# Altium PCB TopLayer_lfr.PcbDoc
Units mm, origin at the board's own origin, x right, y up, seen from the top; angles counter-clockwise.
Board outline 140 x 82.71 mm, 2 copper layers (Top Layer, Bottom Layer); 31 components, 20 nets, 97 pads, 0 vias.
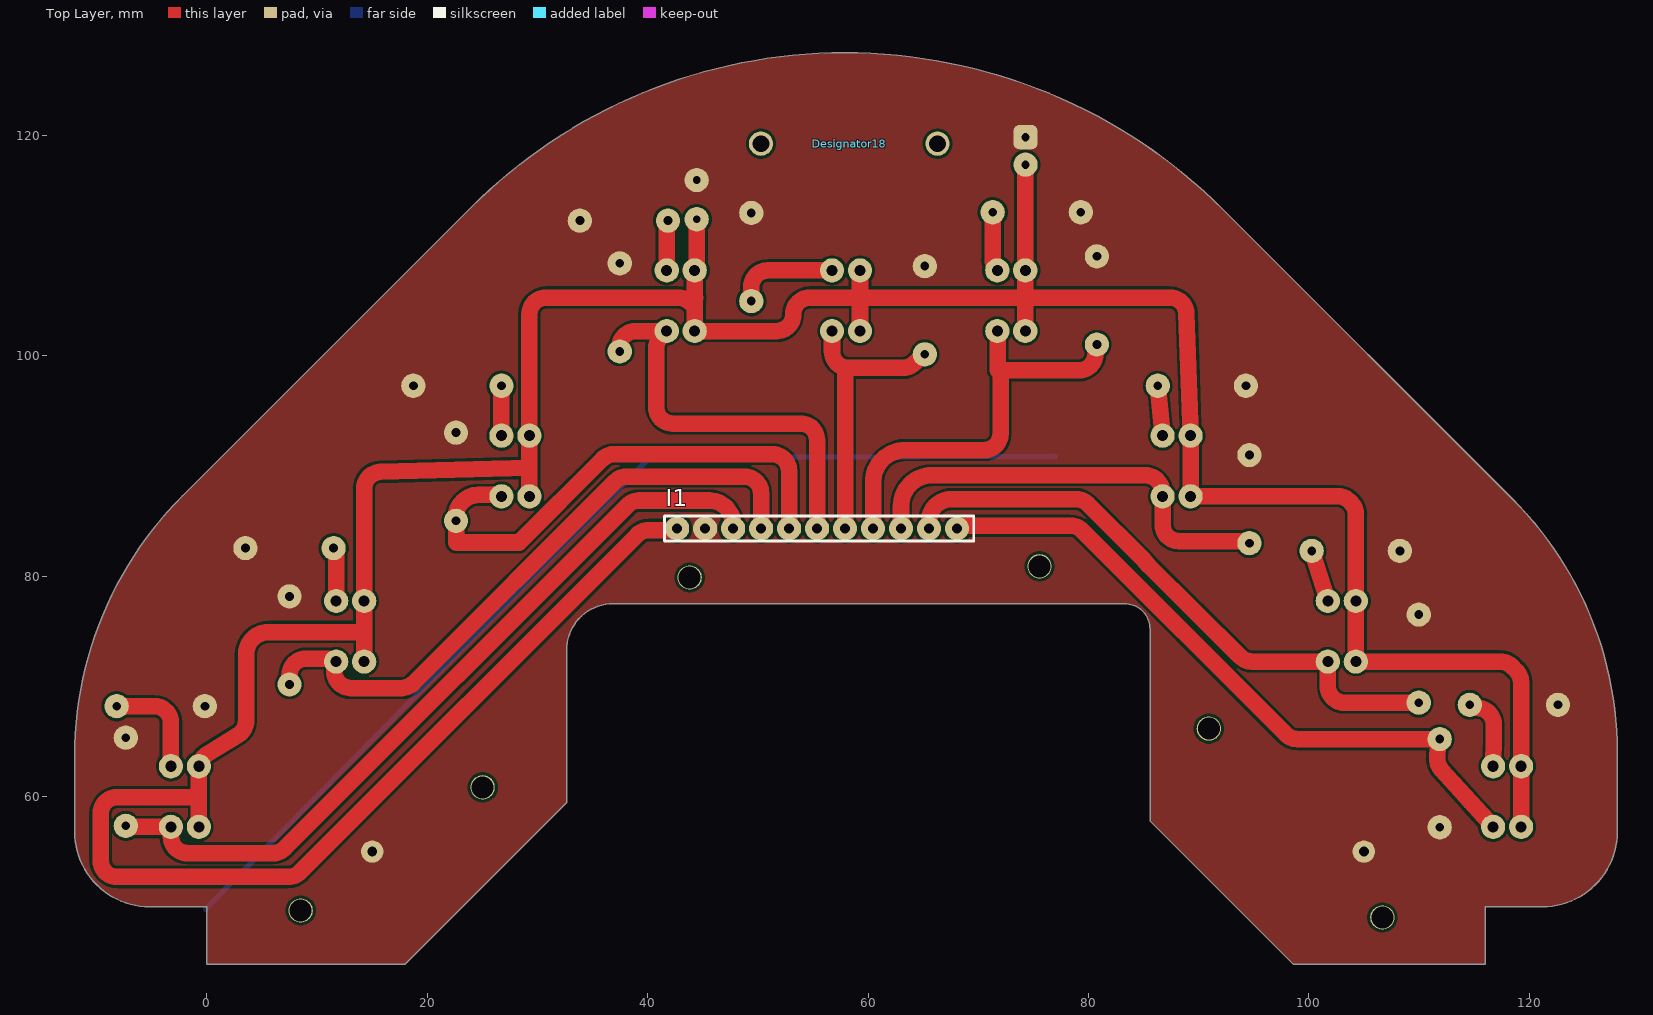
[diagram p0: Top Layer view]
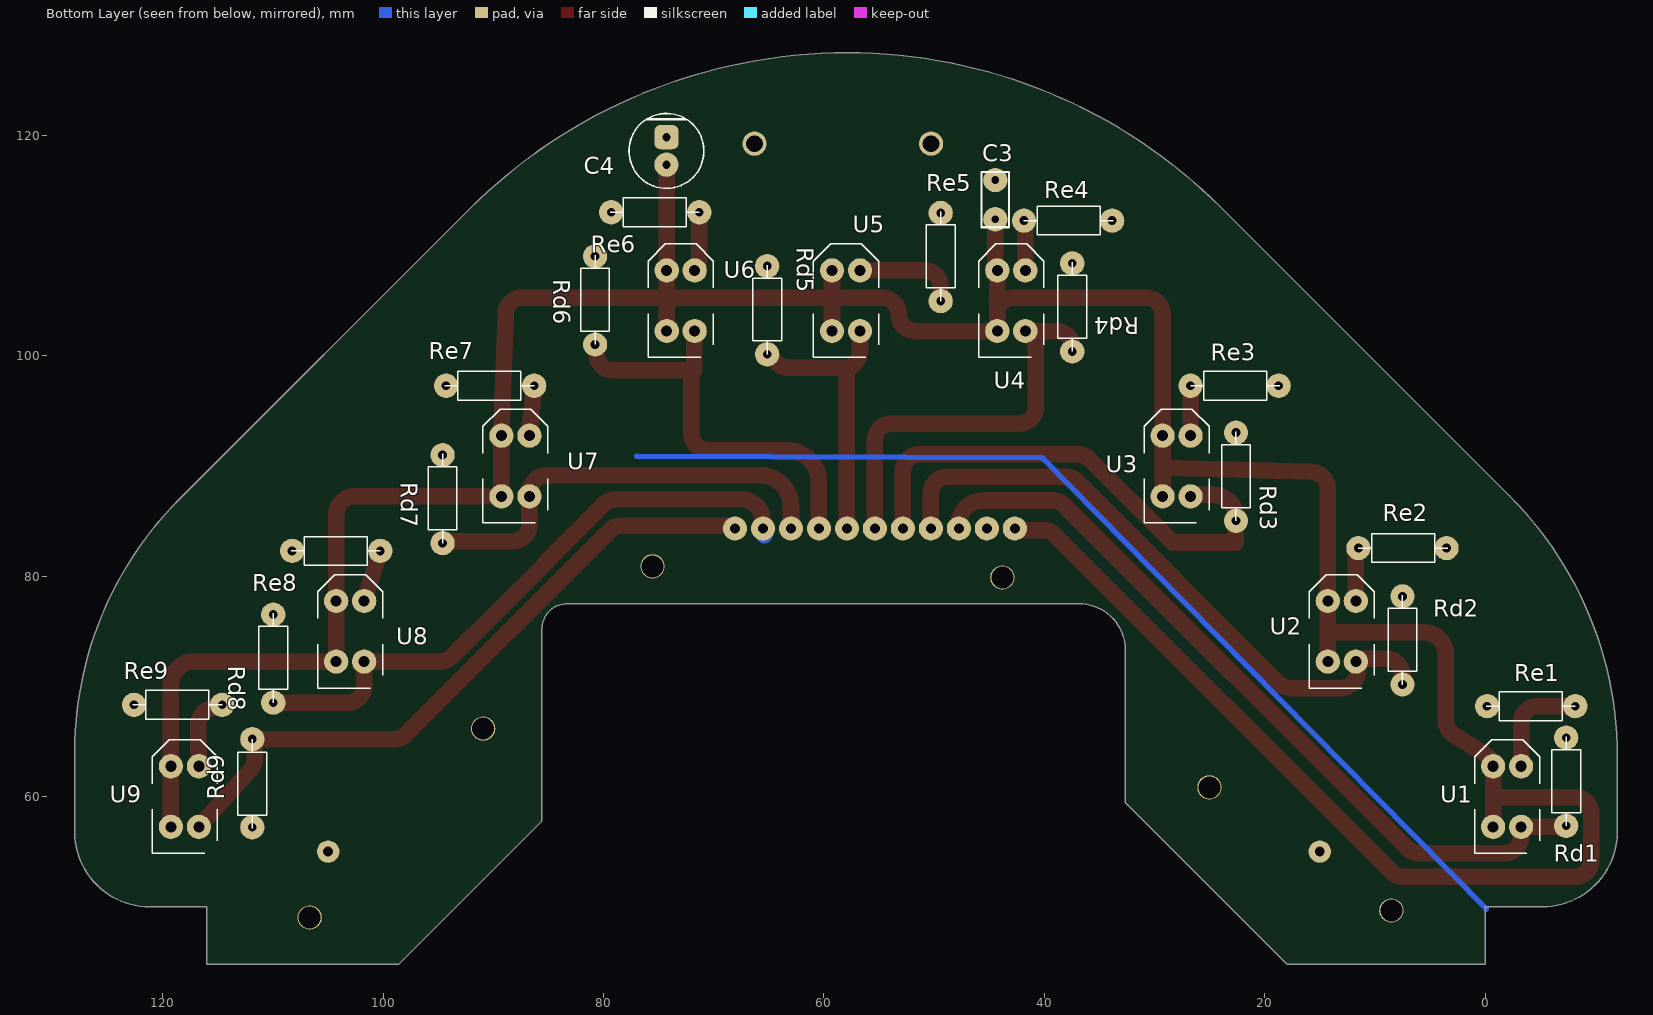
[diagram p1: Bottom Layer view, seen from below]

## Layer stack, top to bottom
Top Solder: solder mask 0.0102, Solder Resist, Dk 3.5
Top Layer: signal copper 0.0356
Dielectric 1: dielectric 0.32, FR-4, Dk 4.8
Bottom Layer: signal copper 0.0356
Bottom Solder: solder mask 0.0102, Solder Resist, Dk 3.5

## Board outline
0,44.8 18.003,44.8 32.639,59.436 32.639,73.279 cw(c36.86,73.279) 36.86,77.5 83.3,77.5 cw(c83.3,75.202) 85.598,75.202 85.598,57.785 98.583,44.8 116,44.8 116,50 121.2,50 ccw(c121.2,56.8) 128,56.8 128,64.02 ccw(c95.456,64.02) 118.468,87.032 92.215,113.285 ccw(c57.878,78.949) 57.878,127.508 ccw(c57.878,79.538) 23.958,113.458 -2.219,87.281 ccw(c21.393,63.668) -12,63.668 -12,56.8 ccw(c-5.2,56.8) -5.2,50 0,50

## Design rules (kind name [scope] priority, off if disabled: settings)
Clearance Clearance_2 [InNamedPolygon('GND_L01_P000')] p1: gap=0.254 ignorepadtopadclearanceinfootprint=FALSE
Clearance Clearance_1 [InNamedPolygon('UP_G_P')] p2: gap=0.254 ignorepadtopadclearanceinfootprint=FALSE
Clearance [All] p3: gap=0.254 ignorepadtopadclearanceinfootprint=FALSE
PolygonConnect PolygonConnect_7 [All vs IsNamedPolygon('GND_L01_P000')] p1: thpad.connectstyle=Direct thpad.reliefconductorwidth=0.254 thpad.reliefentries=4 thpad.polygonreliefangle="90 Angle" thpad.airgapwidth=0.254 smdpad.connectstyle=Relief smdpad.reliefconductorwidth=0.254 smdpad.reliefentries=4 smdpad.polygonreliefangle="90 Angle" smdpad.airgapwidth=0.254 via.connectstyle=Relief via.reliefconductorwidth=0.254 via.reliefentries=4 via.polygonreliefangle="90 Angle" via.airgapwidth=0.254
PolygonConnect PolygonConnect_6 [All vs IsNamedPolygon('NONET_L01_P000')] p2: thpad.connectstyle=Direct thpad.reliefconductorwidth=0.254 thpad.reliefentries=4 thpad.polygonreliefangle="90 Angle" thpad.airgapwidth=0.254 smdpad.connectstyle=Relief smdpad.reliefconductorwidth=0.254 smdpad.reliefentries=4 smdpad.polygonreliefangle="90 Angle" smdpad.airgapwidth=0.254 via.connectstyle=Relief via.reliefconductorwidth=0.254 via.reliefentries=4 via.polygonreliefangle="90 Angle" via.airgapwidth=0.254
PolygonConnect PolygonConnect_5 [All vs IsNamedPolygon('B_G_P')] p3: thpad.connectstyle=Direct thpad.reliefconductorwidth=0.254 thpad.reliefentries=4 thpad.polygonreliefangle="90 Angle" thpad.airgapwidth=0.254 smdpad.connectstyle=Relief smdpad.reliefconductorwidth=0.254 smdpad.reliefentries=4 smdpad.polygonreliefangle="90 Angle" smdpad.airgapwidth=0.254 via.connectstyle=Relief via.reliefconductorwidth=0.254 via.reliefentries=4 via.polygonreliefangle="90 Angle" via.airgapwidth=0.254
PolygonConnect PolygonConnect_4 [All vs IsNamedPolygon('UP_G_P')] p4: thpad.connectstyle=Direct thpad.reliefconductorwidth=0.254 thpad.reliefentries=4 thpad.polygonreliefangle="90 Angle" thpad.airgapwidth=0.254 smdpad.connectstyle=Relief smdpad.reliefconductorwidth=0.254 smdpad.reliefentries=4 smdpad.polygonreliefangle="90 Angle" smdpad.airgapwidth=0.254 via.connectstyle=Relief via.reliefconductorwidth=0.254 via.reliefentries=4 via.polygonreliefangle="90 Angle" via.airgapwidth=0.254
PolygonConnect PolygonConnect_3 [All vs IsNamedPolygon('UP_G_P')] p5: thpad.connectstyle=Relief thpad.reliefconductorwidth=0.254 thpad.reliefentries=4 thpad.polygonreliefangle="90 Angle" thpad.airgapwidth=0.1 smdpad.connectstyle=Relief smdpad.reliefconductorwidth=0.254 smdpad.reliefentries=4 smdpad.polygonreliefangle="90 Angle" smdpad.airgapwidth=0.254 via.connectstyle=Relief via.reliefconductorwidth=0.254 via.reliefentries=4 via.polygonreliefangle="90 Angle" via.airgapwidth=0.254
PolygonConnect PolygonConnect_2 [All vs IsNamedPolygon('UP_G_P')] p6: thpad.connectstyle=Direct thpad.reliefconductorwidth=0.254 thpad.reliefentries=4 thpad.polygonreliefangle="90 Angle" thpad.airgapwidth=0.254 smdpad.connectstyle=Relief smdpad.reliefconductorwidth=0.254 smdpad.reliefentries=4 smdpad.polygonreliefangle="90 Angle" smdpad.airgapwidth=0.254 via.connectstyle=Relief via.reliefconductorwidth=0.254 via.reliefentries=4 via.polygonreliefangle="90 Angle" via.airgapwidth=0.254
PolygonConnect PolygonConnect_1 [All vs IsNamedPolygon('B_G_P')] p7: connectstyle=Direct reliefconductorwidth=0.254 reliefentries=4 polygonreliefangle="90 Angle" airgapwidth=0.254
PolygonConnect [All] p8: connectstyle=Relief reliefconductorwidth=0.254 reliefentries=4 polygonreliefangle="90 Angle" airgapwidth=0.254
RoutingVias [All] p1: holewidth=0.711 width=1.27 viastyle="Through Hole" minholewidth=0.711 minwidth=1.27 maxholewidth=0.711 maxwidth=1.27
SolderMaskExpansion [All] p1: expansion=0.102 istentingtop=FALSE
SupplyNets "Schematic Supply Nets_1" [InNet('GND')] p1: voltage=0.000
SupplyNets "Schematic Supply Nets" [InNet('+5')] p2: voltage=0.000
Width [All] p1: maxlimit=5 minlimit=0.1 preferedwidth=1.2 minimp=50.000000 maximp=50.000000 favimp=50.000000
30 further rules are at their usual default settings.

## Classes and differential pairs
component class MCU: C3 C4
component class IR_array: I1 Rd1 Rd2 Rd3 Rd4 Rd5 Rd6 Rd7 Rd8 Rd9 Re1 Re2 Re3 Re4 Re5 Re6 Re7 Re8 Re9 U1 U2 U3 U4 U5 U6 U7 U8 U9

## Components (designator, comment, footprint, x,y, rotation, side; value= is the part's Value field where it differs from the comment)
C3 "0.1uF" FP-RDE0P1-MFG 44.45,114.173 r90 bottom
C4 "ECEA1CKA101I" FP-RAD-TH-D_6_3_0_5-L_7_1-MFG 74.295,118.598 r270 bottom
Designator18 "Comment" PCBComponent_1 58.293,119.253 r0 top
I1 "MHP1x11" MHP_1x11_ 42.672,84.328 r0 top locked
Rd1 "10k" RESAD1100W55L680D260 -7.366,61.341 r270 bottom
Rd2 "10k" RESAD1100W55L680D260 7.493,74.168 r270 bottom
Rd3 "10k" RESAD1100W55L680D260 22.606,89.027 r270 bottom
Rd4 "10k" RESAD1100W55L680D260 37.465,104.394 r270 bottom
Rd5 "10k" RESAD1100W55L680D260 65.151,104.14 r270 bottom
Rd6 "10k" RESAD1100W55L680D260 80.772,105.029 r270 bottom
Rd7 "10k" RESAD1100W55L680D260 94.615,86.995 r270 bottom
Rd8 "10k" RESAD1100W55L680D260 109.982,72.517 r270 bottom
Rd9 "10k" RESAD1100W55L680D260 111.887,61.214 r90 bottom
Re1 "220" RESAD1100W55L680D260 -4.191,68.199 r180 bottom
Re2 "220" RESAD1100W55L680D260 7.493,82.55 r0 bottom
Re3 "220" RESAD1100W55L680D260 22.733,97.282 r0 bottom
Re4 "220" RESAD1100W55L680D260 37.846,112.268 r0 bottom
Re5 "220" RESAD1100W55L680D260 49.403,108.966 r270 bottom
Re6 "220" RESAD1100W55L680D260 75.311,113.03 r180 bottom
Re7 "220" RESAD1100W55L680D260 90.297,97.282 r180 bottom
Re8 "220" RESAD1100W55L680D260 104.267,82.296 r180 bottom
Re9 "220" RESAD1100W55L680D260 118.618,68.326 r180 bottom
U1 "TCRT5000" TCRT5000 -2,60 r90 bottom locked
U2 "TCRT5000" TCRT5000 13,75 r90 bottom locked
U3 "TCRT5000" TCRT5000 28,90 r90 bottom locked
U4 "TCRT5000" TCRT5000 43,105 r90 bottom locked
U5 "TCRT5000" TCRT5000 58,105 r90 bottom locked
U6 "TCRT5000" TCRT5000 73,105 r90 bottom locked
U7 "TCRT5000" TCRT5000 88,90 r90 bottom locked
U8 "TCRT5000" TCRT5000 103,75 r90 bottom locked
U9 "TCRT5000" TCRT5000 118,60 r90 bottom locked

## Footprints (in the part's own frame and the unit in brackets; to place one, negate y for a bottom-side part, rotate by r counter-clockwise, add the part's x,y. Pads: shape width x height; smd on the part's side, far side on the other; paste and mask are expansions set on the pad)
FP-RAD-TH-D_6_3_0_5-L_7_1-MFG [mm]
  rrect50% 2.2x2.2 hole 0.762 paste-2539.97 mask+0: 1(-1.25,0)
  round 2.2 hole 0.762 paste-2539.97 mask+0: 2(1.25,0)
  silkscreen extent -3.4,-3.4 3.4,3.4, body extent -3.15,-3.16 3.15,3.15, height 8
FP-RDE0P1-MFG [mm]
  round 2.2 hole 0.7 paste-2539.97 mask+0: 1(-1.778,0) 2(1.778,0)
  silkscreen extent -2.5,-1.25 2.5,1.25, body extent -2.5,-1.25 2.5,1.25, height 6
MHP_1x11_ [mm]
  round 2.2 hole 0.9 mask+0.102: 1(0,0) 2(2.54,0) 3(5.08,0) 4(7.62,0) 5(10.16,0) 6(12.7,0) 7(15.24,0) 8(17.78,0) 9(20.32,0) 10(22.86,0) 11(25.4,0)
  silkscreen extent -1.14,-1.14 26.92,1.14
PCBComponent_1 [mm]
  round 2.2 hole 1.524: 18(-8.014,0) 19(8.014,0)
RESAD1100W55L680D260 [mm]
  round 2.2 hole 0.8: 1(-4,0) 2(4,0)
  silkscreen extent -4.1,-1.3 4,1.3, body extent -4.7,-1.4 4.7,1.52, height 0.25
TCRT5000 [mm]
  round 2.2 hole 1: A(2.75,1.27) CATH(2.75,-1.27) COLL(-2.75,1.27) E(-2.75,-1.27)
  silkscreen extent -5.15,-2.95 5.15,2.95

## Part data
C3: library part CMP-06035-046728-1, "Ceramic Capacitor 100nF ±10% 25V X7R Radial", Capacitance=100nF, Case/Package=Radial, Dielectric=X7R, Max Operating Temperature=125°C, Min Operating Temperature=-55°C, Package Quantity=2000, Resistor Type=Ceramic, Tolerance=10%, Voltage Rating=25V, Height=3.5mm, Height - Seated (Max)=0.236inch, Lead Diameter=0.5mm, Lead Free="Lead Free", Lead Pitch=0.098inch, Length=0.197inch, Mount="Through Hole", Packaging="Tape and Reel", Termination=Radial, Voltage Rating (DC)=25V, Width=3.5mm
C4: library part CMP-05427-001316-1, "Aluminum Electrolytic Capacitors (Radial Lead Type) 100uF ±20% 16V", Capacitance=100uF, Case/Package=Radial, Max Operating Temperature=85°C, Min Operating Temperature=-40°C, Package Quantity=2000, Ripple Current=91mA, Tolerance=20%, Voltage=16V, Diameter=6.3mm, Height=7mm, Height - Seated (Max)=0.315inch, Lead Diameter=0.45mm, Lead Pitch=2.5mm, Length=7mm, Life (Hours)=1000Hour, Mount="Through Hole", Packaging="Tape and Reel", Polarity=Polar, Radiation Hardening=No, RoHS Compliant=Yes, Series=KA, Termination=Radial, Voltage Rating=16V, Voltage Rating (DC)=16V
Rd1 Rd2 Rd3 Rd4 Rd5 Rd6 Rd7 Rd8 Rd9 Re1 Re2 Re3 Re4 Re5 Re6 Re7 Re8 Re9: library part MFR-25FBF52-1K, "1.07 kOhms Â±1% 0.25W, 1/4W Through Hole Resistor Axial - Metal Film", Package="Axial Yageo", Availability="In Stock", Check_prices=https://www.snapeda.com/parts/MFR-25FBF52-1K/Yageo/view-part/?ref=eda, MF=Yageo, MP=MFR-25FBF52-1K, Price=None, Purchase-URL=https://pricing.snapeda.com/search/part/MFR-25FBF52-1K/?ref=eda, SnapEDA_Link=https://www.snapeda.com/parts/MFR-25FBF52-1K/Yageo/view-part/?ref=snap
U1 U2 U3 U4 U5 U6 U7 U8 U9: "950 nm 60 mA Through Hole Reflective Optical Sensor with Transistor Output", Package=None, Availability=Unavailable, MP=TCRT5000, Price=None

## Free pads (board coordinates)
  round 2.032 hole 0.9: 2(15,55) 2(105,55)
  round 2.2 hole 2: 2(75.565,80.899) 3(43.815,79.883) 4(106.68,49.022) 6(8.509,49.657) 7(25.019,60.833) 8(90.932,66.167)

## Nets (pads, with @x,y where several pads share a name; then routed paths per layer and width w, separated by ;. In a path a pad name is that pad's centre, name@x,y a point inside that pad or via, vN(x,y) a via of type N, cw(c..) or ccw(c..) an arc to the next point about the centre after c; other vN are vias at no path point)
+5: C3.1 C4.2 I1.1 U1.A U1.COLL U2.A U2.COLL U3.A U3.COLL U4.A U4.COLL U5.A U5.COLL U6.A U6.COLL U7.A U7.COLL U8.A U8.COLL U9.A U9.COLL | length 327.3
  Top Layer w1.5: U1.COLL -0.73,59.944 ; U2.COLL 14.27,74.651 ; U3.COLL U3.A 29.27,103.783 cw(c30.77,103.783) 30.77,105.283 42.77,105.283 cw(c42.77,103.783) 43.831,104.844 43.857,104.817 44.27,105.23 ; 29.27,89.859 29.268,89.859 ccw(c29.309,88.36) 29.262,89.859 15.726,89.459 ccw(c15.77,87.959) 14.27,87.959 U2.A 14.27,74.651 ; I1.1@42.533,84.255 I1.1 42.533,84.189 40.106,84.189 ccw(c40.106,82.689) 39.046,83.75 8.439,53.143 cw(c7.38,54.205) 7.38,52.705 -8.152,52.705 cw(c-8.152,54.205) -9.652,54.205 -9.652,58.444 cw(c-8.152,58.444) -8.152,59.944 -0.73,59.944 ; 44.323,105.283 44.27,105.23 ; C3.1 44.45,108.462 cw(c42.95,108.462) U4.A 44.27,105.23 ; U5.COLL 59.27,105.283 ; U5.A 59.27,105.283 ; U6.COLL 74.27,105.283 ; C4.2 74.282,117.335 74.282,107.763 U6.A 74.27,105.283 ; U9.COLL U9.A 119.27,70.355 ccw(c117.77,70.355) 118.831,71.415 118.435,71.811 ccw(c117.375,70.75) 117.375,72.25 U8.COLL U8.A 104.27,85.62 ccw(c102.77,85.62) 103.831,86.68 103.7,86.811 ccw(c102.64,85.75) 102.64,87.25 U7.COLL U7.A 88.899,103.835 ccw(c87.4,103.783) 87.403,105.283 74.27,105.283 ; -0.73,59.944 U1.A -0.676,62.946 cw(c0.77,62.547) -0.023,63.821 2.849,65.607 ccw(c2.056,66.881) 3.556,66.881 3.556,72.898 cw(c5.588,72.898) 5.588,74.93 5.591,74.93 13.335,74.93 cw(c13.333,73.43) 13.344,74.93 cw(c13.332,73.213) 14.27,74.651 ; 44.27,105.23 44.27,104.844 U4.COLL 51.713,102.25 ccw(c51.713,103.75) 53.213,103.75 53.213,103.783 cw(c54.713,103.783) 54.713,105.283 59.27,105.283 ; 59.27,105.283 74.27,105.283
GND: C3.2 C4.1 I1.2 pad.2@15,55 pad.2@105,55 Rd1.1 Rd2.1 Rd3.1 Rd4.1 Rd5.1 Rd6.1 Rd7.1 Rd8.1 Rd9.1 Re1.1 Re2.1 Re3.1 Re4.1 Re5.1 Re6.1 Re7.1 Re8.1 Re9.1
IR_01: I1.3 Rd1.2 U1.E | length 71.3
  Top Layer w1.5: Rd1.2 -7.291,57.341 -7.2,57.25 U1.E -3.27,56.364 ccw(c-1.77,56.364) -1.77,54.864 5.983,54.864 ccw(c5.983,56.364) 7.042,55.302 38.169,86.429 cw(c39.229,85.368) 39.229,86.868 45.593,86.868 cw(c45.593,84.709) I1.3@47.752,84.709
IR_02: I1.4 Rd2.2 U2.E | length 58.4
  Top Layer w1.5: Rd2.2 7.493,71.017 cw(c8.993,71.017) 8.993,72.517 10.879,72.517 cw(c10.876,71.017) U2.E 11.729,72.248 ccw(c13.057,71.551) 11.557,71.553 11.557,71.35 ccw(c13.057,71.35) 13.057,69.85 17.667,69.85 ccw(c17.667,71.35) 18.726,70.288 37.026,88.588 cw(c38.086,87.527) 38.086,89.027 48.792,89.027 cw(c48.792,87.527) 50.292,87.527 I1.4
IR_03: I1.5 Rd3.2 U3.E | length 47.5
  Top Layer w1.5: U3.E@26.549,86.975 26.55,86.976 U3.E ccw(c26.128,85.876) 26.128,87.376 26.094,87.376 25.941,87.376 cw(c25.938,88.876) 25.938,87.376 24.637,87.376 ccw(c24.641,85.32) Rd3.2 22.606,83.058 28.321,83.058 35.883,90.62 cw(c36.943,89.559) 36.943,91.059 51.332,91.059 cw(c51.332,89.559) 52.832,89.559 I1.5
IR_04: I1.6 Rd4.2 U4.E | length 37.1
  Top Layer w1.5: Rd4.2 cw(c38.922,100.75) 38.919,102.25 U4.E 41.206,101.726 ccw(c42.267,100.666) 40.767,100.667 40.767,95.353 ccw(c42.267,95.353) 42.267,93.853 53.872,93.853 cw(c53.872,92.353) 55.372,92.353 I1.6
IR_05: I1.7 Rd5.2 U5.E | length 26
  Top Layer w1.5: U5.E 56.73,100.4 ccw(c58.23,100.403) 58.23,98.903 63.142,98.903 ccw(c63.142,100.403) 64.087,99.238 64.935,99.926 ccw(c63.992,101.092) Rd5.2 ; I1.7 57.912,98.784
IR_06: I1.8 Rd6.2 U6.E | length 37.9
  Top Layer w1.5: I1.8 60.452,88.521 cw(c63.373,88.519) 63.373,91.44 63.376,91.44 70.528,91.44 ccw(c70.528,92.94) 72.028,92.94 72.028,98.679 ; U6.E 71.774,102.205 71.774,98.933 ; 71.774,98.701 ccw(c72.028,100.179) 72.028,98.679 ; Rd6.2 80.624,99.971 cw(c79.138,100.179) 79.138,98.679 72.028,98.679
IR_07: I1.9 Rd7.2 U7.E | length 40
  Top Layer w1.5: I1.9 62.992,86.361 cw(c65.786,86.36) 65.786,89.154 85.124,89.154 cw(c85.124,87.547) 86.721,87.359 ccw(c87.718,87.244) U7.E@86.714,87.253 ; U7.E 86.73,84.685 ccw(c88.23,84.685) 88.23,83.185 93.696,83.185 cw(c93.693,81.685) Rd7.2@94.615,82.868
IR_08: I1.10 Rd8.2 U8.E | length 55.9
  Top Layer w1.5: I1.10 65.532,84.963 cw(c67.564,84.963) 67.564,86.995 78.881,86.995 cw(c78.881,85.495) 79.941,86.556 85.089,81.408 cw(c84.028,80.348) 85.259,81.205 ccw(c86.808,82.293) 85.476,80.948 93.812,72.682 ccw(c94.865,73.75) 94.861,72.25 U8.E 101.73,70.017 ccw(c103.23,70.017) 103.23,68.517 Rd8.2
  Bottom Layer w1.5: I1.10@65.405,83.727 cw(c66.905,83.724) I1.10
IR_09: I1.11 Rd9.2 U9.E | length 61.7
  Top Layer w1.5: I1.11 cw(c68.907,83.082) 68.907,84.582 78.373,84.582 cw(c78.373,83.082) 79.432,84.144 97.923,65.653 ccw(c98.983,66.714) 98.983,65.214 Rd9.2 ccw(c113.198,64.486) 111.7,64.548 111.657,63.478 ccw(c113.156,63.419) 112.046,62.411 114.641,59.551 cw(c107.295,52.874) 114.646,59.546 U9.E ; U9.E cw(c117.839,58.26) 116.728,57.252 U9.E
NetRe1_2: Re1.2 U1.CATH | length 9.7
  Top Layer w1.5: Re1.2 -4.77,68.199 cw(c-4.77,66.699) -3.27,66.699 U1.CATH
NetRe2_2: Re2.2 U2.CATH | length 4.9
  Top Layer w1.5: Re2.2 11.493,82.475 11.73,82.238 U2.CATH
NetRe3_2: Re3.2 U3.CATH | length 4.5
  Top Layer w1.5: U3.CATH U3.CATH 26.731,97.281 Re3.2
NetRe4_2: Re4.2 U4.CATH | length 4.6
  Top Layer w1.5: U4.CATH 41.73,112.077 41.846,112.193 Re4.2
NetRe5_2: Re5.2 U5.CATH | length 9.5
  Top Layer w1.5: Re5.2 49.403,106.25 cw(c50.903,106.25) 50.903,107.75 U5.CATH
NetRe6_2: Re6.2 U6.CATH | length 5.3
  Top Layer w1.5: Re6.2@71.311,112.955 71.311,108.79 ccw(c72.811,108.79) U6.CATH
NetRe7_2: Re7.2 U7.CATH | length 4.6
  Top Layer w1.5: Re7.2 ccw(c87.297,97.375) 86.297,97.28 U7.CATH
NetRe8_2: Re8.2 U8.CATH | length 4.8
  Top Layer w1.5: Re8.2 ccw(c101.696,82.753) 100.268,82.294 101.729,77.752 ccw(c103.157,78.212) U8.CATH
NetRe9_2: Re9.2 U9.CATH | length 6.2
  Top Layer w1.5: Re9.2@115.283,68.044 cw(c115.283,66.544) 116.783,66.544 116.783,65.496 cw(c115.283,65.496) 116.783,65.467 U9.CATH
pads on no net: Designator18.18 Designator18.19
copper on no net: | length 94.4
  Bottom Layer w0.127: 40.173,90.719 cw(c40.263,90.63) 40.263,90.757 ; 77.008,90.884 cw(c77.008,90.757) 77.1,90.845
  Bottom Layer w0.5: -0.127,49.784 9.948,60.018 30.098,80.485 40.173,90.719 ; 40.263,90.757 77.008,90.884

## Polygon pours and split planes (outlines as drawn)
GND on Top Layer "GND_L01_P000" (solid, pour order 0): 0,44.8 18.003,44.8 32.639,59.436 32.639,73.279 cw(c36.86,73.279) 36.86,77.5 83.3,77.5 cw(c83.3,75.202) 85.598,75.202 85.598,57.785 98.583,44.8 116,44.8 116,50 121.2,50 ccw(c121.2,56.8) 128,56.8 128,64.02 ccw(c95.456,64.02) 118.468,87.032 92.215,113.285 ccw(c57.878,78.949) 57.878,127.508 ccw(c57.878,79.538) 23.958,113.458 -2.219,87.281 ccw(c21.393,63.668) -12,63.668 -12,56.8 ccw(c-5.2,56.8) -5.2,50 0,50

## Silkscreen, mask and mechanical layers (free items; w line width, h text height)
Top Component Center:
  lines w0.127: 0.127,49.784 0.127,50.546 5.461,50.546